# Altium PCB Portablizer_PCB.PcbDoc
Units mm, origin at the board's own origin, x right, y up, seen from the top; angles counter-clockwise.
Board outline 73.91 x 92.08 mm, 2 copper layers (Top Layer, Bottom Layer); 69 components, 53 nets, 338 pads, 22 vias.
Unrouted connection lines stored in the file: 2.
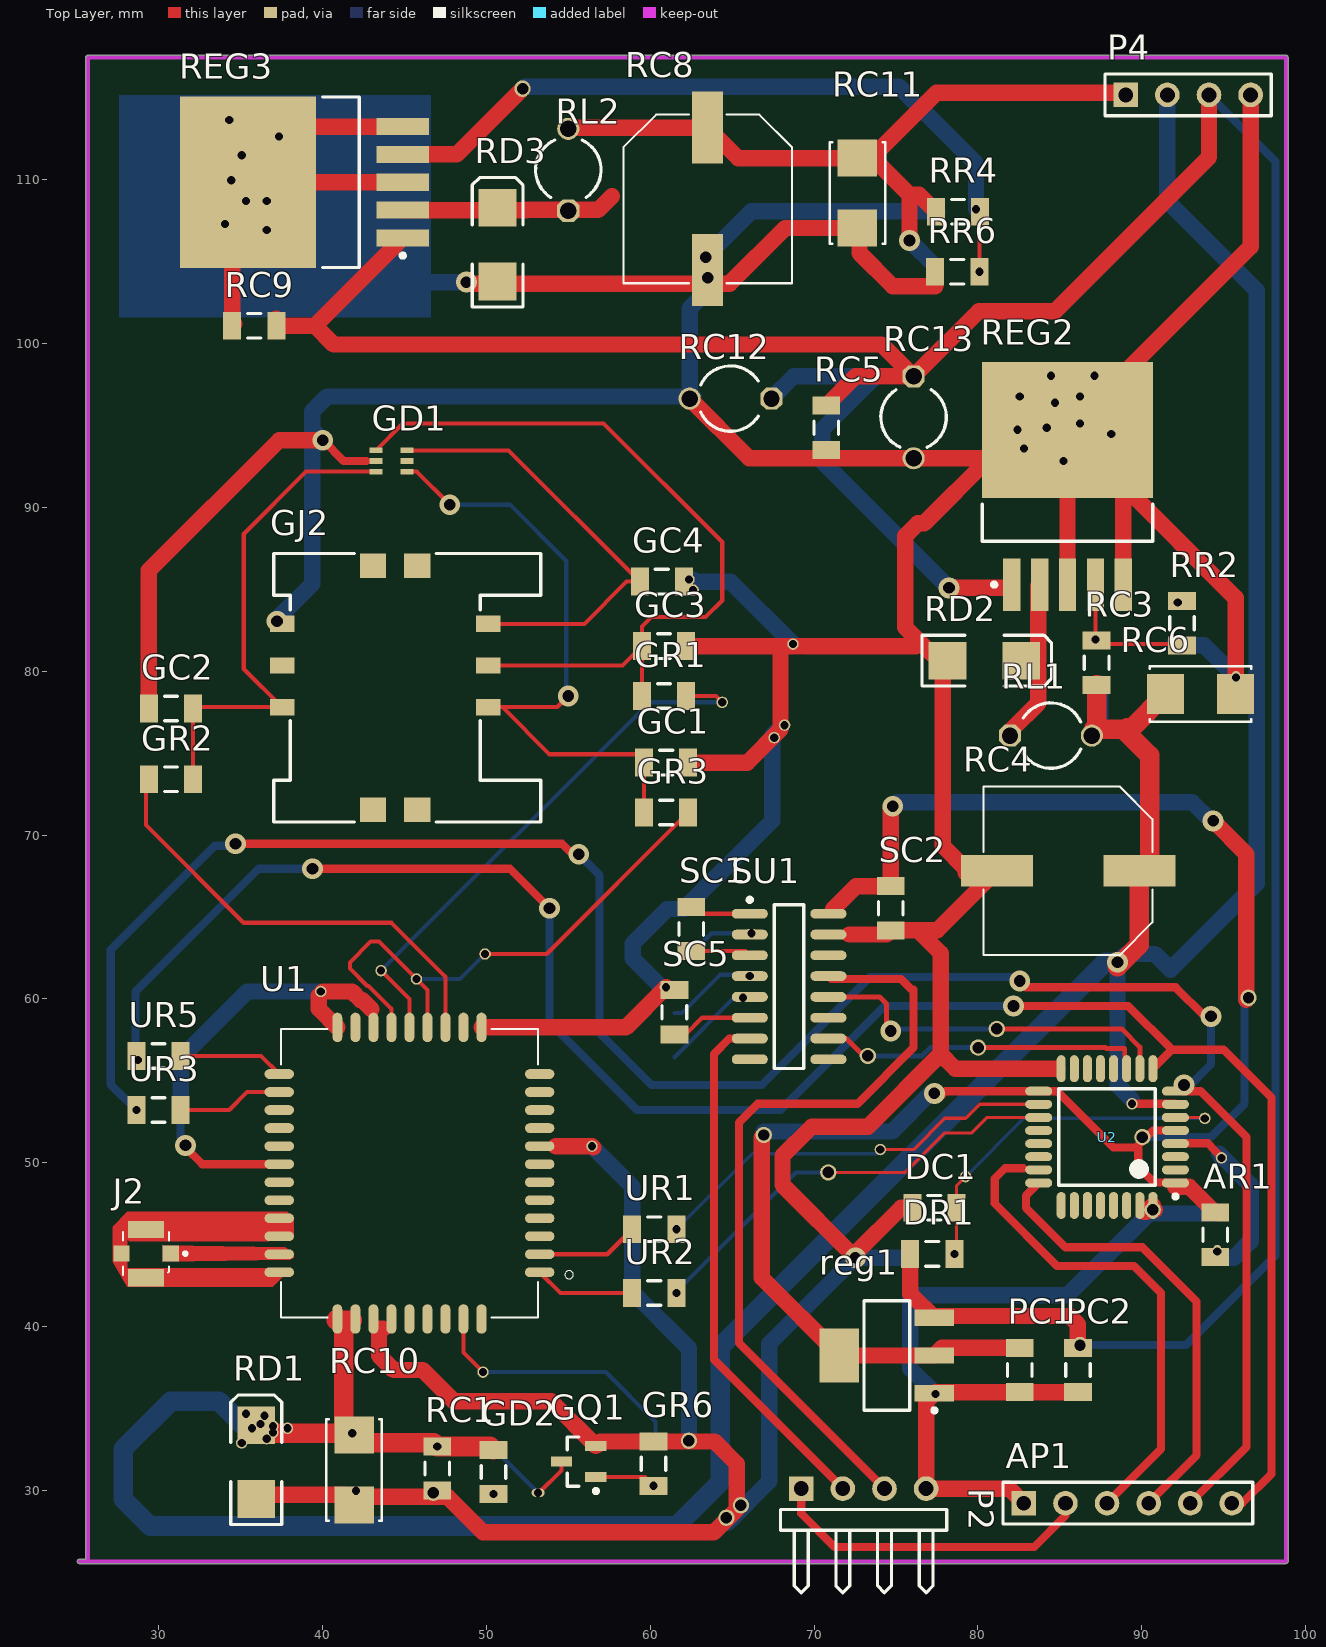
[diagram p0: Top Layer view]
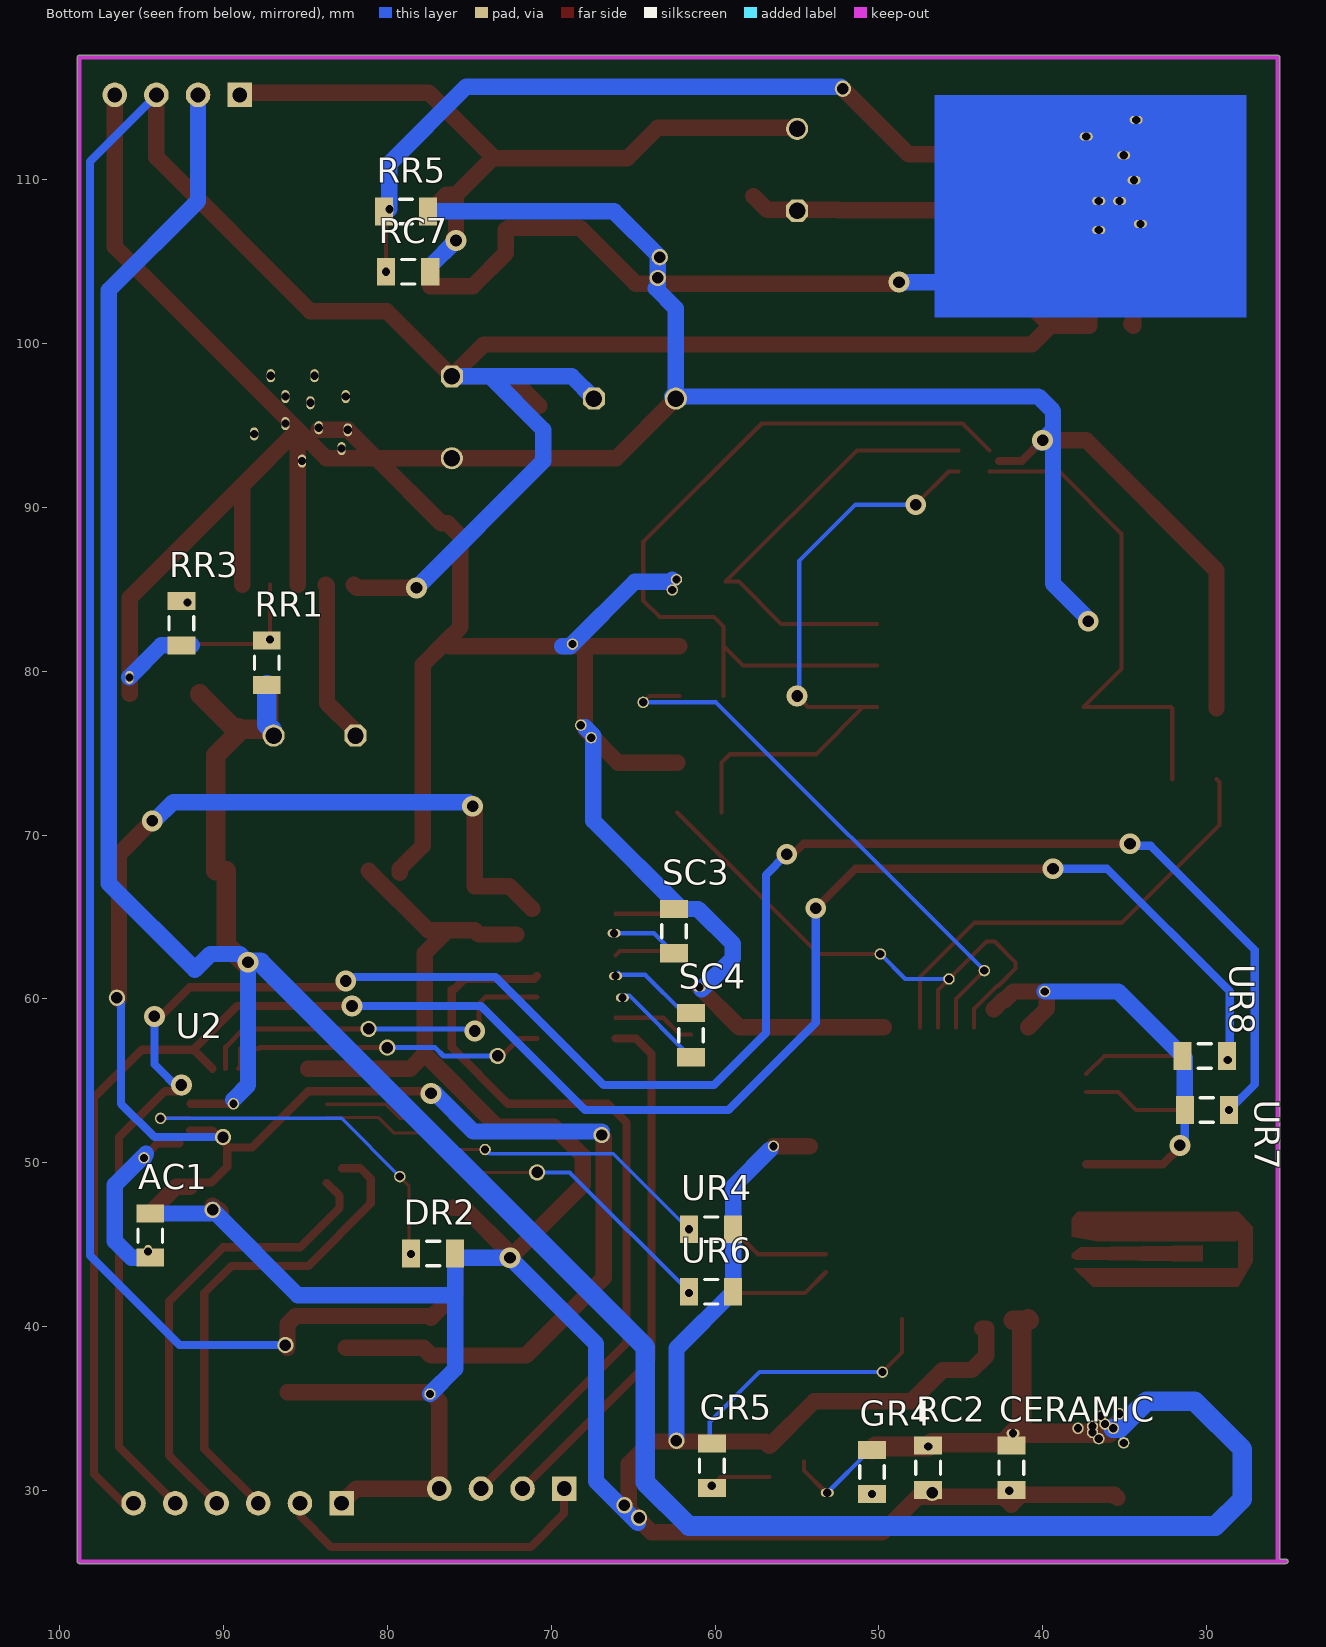
[diagram p1: Bottom Layer view, seen from below]

## Layer stack, top to bottom
Top Solder: solder mask 0.0102, Solder Resist, Dk 3.5
Top Layer: signal copper 0.0356
Dielectric 1: dielectric 0.32, FR-4, Dk 4.8
Bottom Layer: signal copper 0.0356
Bottom Solder: solder mask 0.0102, Solder Resist, Dk 3.5

## Board outline
25.146,25.527 cw(c25.146,25.654) 25.146,25.781 25.527,25.781 25.527,117.475 cw(c25.654,117.475) 25.654,117.602 98.806,117.602 cw(c98.806,117.475) 98.933,117.475 98.933,25.654 cw(c98.806,25.654) 98.806,25.527

## Design rules (kind name [scope] priority, off if disabled: settings)
Clearance [All] p1: gap=0.254 ignorepadtopadclearanceinfootprint=FALSE except(0: Arc-Hole Track-Hole SMDPad-Hole THPad-Hole Via-Hole Fill-Hole Poly-Hole Region-Hole Text-Hole)
PolygonConnect [All] p1: connectstyle=Relief reliefconductorwidth=0.254 reliefentries=4 polygonreliefangle="90 Angle" airgapwidth=0.254
RoutingVias [All] p1: holewidth=0.711 width=1.27 viastyle="Through Hole" minholewidth=0.711 minwidth=1.27 maxholewidth=0.711 maxwidth=1.27
SolderMaskExpansion [All] p1: expansion=0.102
Width Width_1 [(InNet('3.3V') OR InNet('5V_POS') OR InNet('NetRD2_2') OR InNet('9V')OR InNet('NetRD3_2') OR InNet('v12') OR InNet('GND'))] p1: maxlimit=1.2 minlimit=0.5 preferedwidth=1
Width [All] p2: maxlimit=1.5 minlimit=0.256 preferedwidth=0.3 minimp=50.000000 maximp=50.000000 favimp=50.000000
30 further rules are at their usual default settings.

## Components (designator, comment, footprint, x,y, rotation, side; value= is the part's Value field where it differs from the comment)
AC1 "Cap Semi" C1206 94.488,45.546 r90 bottom value=100pF
AP1 "ARM CONNECTOR" HDR1X6 82.804,29.21 r0 top
AR1 "Res3" c1206 94.488,45.593 r270 top value=10K
CERAMIC "1~10uF" C1206 41.91,31.369 r90 bottom
DC1 "33pF" C1206 77.343,47.244 r0 top
DR1 "Res3" c1206 77.216,44.432 r0 top value=3M
DR2 "Res3" c1206 77.216,44.45 r180 bottom value=1M
GC1 "33pF" C1206 60.96,74.422 r180 top
GC2 "22pF" C1206 30.734,77.724 r0 top
GC3 "33pF" C1206 60.833,81.534 r180 top
GC4 "100nF" C1206 60.706,85.471 r0 top
GD1 "SMF05C.TCT" SC70-6 44.196,92.837 r270 top
GD2 "LED2" C1206 50.419,31.115 r270 top
GJ2 "SIM_HOLDER" GCT_SIM2055-6-0-XX-00-X_REVI 43.815,78.994 r270 top
GQ1 "PMBT3904" SOT23_N 55.626,31.75 r180 top
GR1 "51" C1206 60.833,78.486 r0 top
GR2 "51" C1206 30.734,73.406 r180 top
GR3 "51" C1206 60.96,71.374 r0 top
GR4 "4.7k" C1206 50.419,31.115 r270 bottom
GR5 "4.7k" C1206 60.198,31.496 r90 bottom
GR6 "47k" C1206 60.198,31.623 r270 top
J2 "1661" MOLEX_1661 29.21,44.45 r90 top
P2 "Header 4H" HDR1X4H 69.215,30.099 r0 top
P4 "Header 4" HDR1X4 89.027,115.189 r0 top
PC1 "Cap Semi" C1206 82.55,37.338 r270 top value=22uF
PC2 "PC1" C1206 86.106,37.338 r270 top value=10uF
RC1 "33pF" C1206 46.99,31.323 r90 top
RC2 "10pF" C1206 46.99,31.369 r90 bottom
RC3 "15nF" C1206 87.249,80.518 r90 top
RC4 "470 μF; 25 V" "WCAP-PSLC 10x12.4x4.5" 85.503,67.818 r180 top
RC5 "100nF" C1206 70.739,94.869 r270 top
RC6 "10uF; 25V" CAPCP6032X280N 93.599,78.613 r0 top
RC7 "15nF" C1206 78.74,104.394 r0 bottom
RC8 "470 μF; 25 V" "WCAP-PSLC 10x12.4x4.5" 63.5,108.839 r270 top
RC9 "100nF" C1206 35.814,101.092 r180 top
RC10 "10uF; 25V" CAPCP6032X280N 41.91,31.242 r270 top
RC11 "10uF; 25V" CAPCP6032X280N 72.644,109.195 r270 top
RC12 "1000uF 16V" CAPR5-4X5 64.897,96.647 r180 top value=100pF
RC13 "1000uF 16V" CAPR5-4X5 76.073,95.504 r270 top value=100pF
RD1 "CDZ55" SMB 35.941,31.714 r90 top
RD2 "SM5822" SMB 80.391,80.645 r0 top
RD3 "SM5822" SMB 50.673,106.045 r90 top
reg1 "ams1117-3.3" SOT223_N 74.443,38.227 r180 top
REG2 "LM2596S-ADJ" TS5B_N 85.471,91.292 r90 top
REG3 "LM2596S-ADJ" TS5B_N 38.883,109.855 r180 top
RL1 "68uH 3.1A (47 33)" CAPR5-4X5 84.455,76.073 r0 top value=10mH
RL2 "68uH 3.1A (47 33)" CAPR5-4X5 54.991,110.617 r90 top value=10mH
RR1 "4.7k; 1%" C1206 87.376,80.518 r90 bottom
RR2 "1k; 1%" C1206 92.456,82.931 r270 top
RR3 "1k; 1%" C1206 92.583,82.931 r90 bottom
RR4 "10k; 1%" C1206 78.787,108.059 r0 top
RR5 "1.8k; 1%" C1206 78.867,108.077 r0 bottom
RR6 "1.8k; 1%" C1206 78.74,104.394 r0 top
SC1 "100nF" C1206 62.502,64.262 r90 top
SC2 "100nF" C1206 74.676,65.532 r90 top
SC3 "100nF" C1206 62.502,64.135 r90 bottom
SC4 "100nF" C1206 61.468,57.785 r270 bottom
SC5 "100nF" C1206 61.468,59.182 r270 top
SU1 "MAX3232ESE+" SO-16_N 68.471,60.753 r0 top
U1 "SIM800C" LCC110P1570X1760X250-42N 45.292,49.356 r180 top
U2 "STM32F030K6T6" STM-LQFP32_N 87.884,51.562 r180 bottom
UR1 "Res3" c1206 60.245,45.932 r0 top value=1K
UR2 "Res3" c1206 60.245,42.037 r180 top value=1K
UR3 "Res3" c1206 29.972,53.213 r180 top value=1K
UR4 "Res3" c1206 60.245,45.932 r180 bottom value=5.6K
UR5 "Res3" c1206 29.972,56.515 r0 top value=1K
UR6 "Res3" c1206 60.245,42.122 r180 bottom value=5.6K
UR7 "Res3" c1206 29.972,53.213 r0 bottom value=5.6K
UR8 "Res3" c1206 30.099,56.515 r0 bottom value=5.6K

## Footprints (in the part's own frame and the unit in brackets; to place one, negate y for a bottom-side part, rotate by r counter-clockwise, add the part's x,y. Pads: shape width x height; smd on the part's side, far side on the other; paste and mask are expansions set on the pad)
C1206 [mm] "Chip Capacitor, Body 3.2x1.6mm, IPC High Density"
  rect 1.1x1.7 smd: 1(-1.35,0) 2(1.35,0)
  silkscreen extent -0.4,-0.75 0.4,0.75, body extent -1.7,-0.9 1.7,0.9, height 1.3
c1206 [mm]
  rect 1.1x1.7 smd: 1(-1.35,0) 2(1.35,0)
  silkscreen extent -0.4,-0.75 0.4,0.75, body extent -1.7,-0.9 1.7,0.9, height 1.3
CAPCP6032X280N [mil]
  rect 89x95 smd: 1(-84,0) 2(84,0)
  silkscreen extent -122,-67 122,67
CAPR5-4X5 [mm]
  oct 1.35x1.35 hole 1: 1(-2.5,0)
  round 1.35 hole 1: 2(2.5,0)
  silkscreen extent -1.69,-2 1.82,2
GCT_SIM2055-6-0-XX-00-X_REVI [mm]
  rect 1.5x1.6 smd: 8(-7.45,-0.75) 9(7.45,-0.75) 10(7.45,1.95) 11(-7.45,1.95)
  rect 1x1.5 smd: C1(-3.9,6.3) C2(-1.36,6.3) C3(1.18,6.3) C5(-3.9,-6.3) C6(-1.36,-6.3) C7(1.18,-6.3)
  silkscreen extent -8.2,-6.8 8.2,9.5
HDR1X4 [mm] "Connector; Header; 4 Position"
  rect 1.5x1.5 hole 0.9: 1(0,0)
  round 1.5 hole 0.9: 2(2.54,0) 3(5.08,0) 4(7.62,0)
  silkscreen extent -1.27,-1.27 8.89,1.27
HDR1X4H [mm] "Connector; Header; 4 Position; Right Angle"
  rect 1.5x1.5 hole 0.9: 1(0,0)
  round 1.5 hole 0.9: 2(2.54,0) 3(5.08,0) 4(7.62,0)
  silkscreen extent -1.27,-6.35 8.89,-1.27
HDR1X6 [mm] "Connector; Header; 6 Position"
  rect 1.5x1.5 hole 0.9: 1(0,0)
  round 1.5 hole 0.9: 2(2.54,0) 3(5.08,0) 4(7.62,0) 5(10.16,0) 6(12.7,0)
  silkscreen extent -1.27,-1.27 13.97,1.27
LCC110P1570X1760X250-42N [mm]
  oval 1.8x0.6 smd: 1(-7.95,6.05) 2(-7.95,4.95) 3(-7.95,3.85) 4(-7.95,2.75) 5(-7.95,1.65) 6(-7.95,0.55) 7(-7.95,-0.55) 8(-7.95,-1.65) 9(-7.95,-2.75) 10(-7.95,-3.85) 11(-7.95,-4.95) 12(-7.95,-6.05) 22(7.95,-6.05) 23(7.95,-4.95) 24(7.95,-3.85) 25(7.95,-2.75) 26(7.95,-1.65) 27(7.95,-0.55) 28(7.95,0.55) 29(7.95,1.65) 30(7.95,2.75) 31(7.95,3.85) 32(7.95,4.95) 33(7.95,6.05)
  oval 0.6x1.8 smd: 13(-4.4,-8.9) 14(-3.3,-8.9) 15(-2.2,-8.9) 16(-1.1,-8.9) 17(0,-8.9) 18(1.1,-8.9) 19(2.2,-8.9) 20(3.3,-8.9) 21(4.4,-8.9) 34(4.4,8.9) 35(3.3,8.9) 36(2.2,8.9) 37(1.1,8.9) 38(0,8.9) 39(-1.1,8.9) 40(-2.2,8.9) 41(-3.3,8.9) 42(-4.4,8.9)
  silkscreen extent -10,-8.8 7.85,8.8
MOLEX_1661 [mm]
  rect 1x1 smd: 1(0,-1.5) 3(0,1.5)
  rect 1.05x2.2 smd: 2(-1.475,0) 4(1.475,0)
  silkscreen extent -1.3,-2.5 1.3,1.4
SC70-6 [mm]
  rect 0.35x0.8 smd: 1(-0.65,-0.95) 2(0,-0.95) 3(0.65,-0.95) 4(0.65,0.95) 5(0,0.95) 6(-0.65,0.95)
SMB [mm]
  rect 2.3x2.3 smd: 1(-2.25,0) 2(2.25,0)
  silkscreen extent -3.8,-1.55 4.1,1.55
SO-16_N [mm] "SOIC, 16-Leads, Body 9.9x3.9mm, Pitch 1.27mm, IPC Medium Density"
  oval 2.2x0.6 smd: 1(-2.4,4.445) 2(-2.4,3.175) 3(-2.4,1.905) 4(-2.4,0.635) 5(-2.4,-0.635) 6(-2.4,-1.905) 7(-2.4,-3.175) 8(-2.4,-4.445) 9(2.4,-4.445) 10(2.4,-3.175) 11(2.4,-1.905) 12(2.4,-0.635) 13(2.4,0.635) 14(2.4,1.905) 15(2.4,3.175) 16(2.4,4.445)
  silkscreen extent -2.52,-5 0.9,5.42, body extent -2,-5 2,5, height 1.75
SOT23_N [mm]
  rect 1.3x0.6 smd: 1(-1.05,0.95) 2(-1.05,-0.95) 3(1.05,0)
  silkscreen extent -1.18,-1.5 0.7,1.92, body extent -0.7,-1.5 0.7,1.5, height 1.1
SOT223_N [mm] "SOT223, 4-Leads, Body 6.5x3.5mm, Pitch 2.3mm, Lead Span 7mm, IPC Medium Density"
  rect 2.4x1 smd: 1(-2.9,2.3) 2(-2.9,0) 3(-2.9,-2.3)
  rect 2.4x3.3 smd: 4(2.9,0)
  silkscreen extent -3.03,-3.35 1.4,3.47, body extent -1.85,-3.35 1.85,3.35, height 1.7
STM-LQFP32_N [mm] "QFP, 32-Leads, Body 7x7mm, Pitch 0.8mm, IPC Medium Density"
  oval 1.65x0.55 smd far side: 1(-4.175,-2.8) 2(-4.175,-2) 3(-4.175,-1.2) 4(-4.175,-0.4) 5(-4.175,0.4) 6(-4.175,1.2) 7(-4.175,2) 8(-4.175,2.8) 17(4.175,2.8) 18(4.175,2) 19(4.175,1.2) 20(4.175,0.4) 21(4.175,-0.4) 22(4.175,-1.2) 23(4.175,-2) 24(4.175,-2.8)
  oval 0.55x1.65 smd far side: 9(-2.8,4.175) 10(-2,4.175) 11(-1.2,4.175) 12(-0.4,4.175) 13(0.4,4.175) 14(1.2,4.175) 15(2,4.175) 16(2.8,4.175) 25(2.8,-4.175) 26(2,-4.175) 27(1.2,-4.175) 28(0.4,-4.175) 29(-0.4,-4.175) 30(-1.2,-4.175) 31(-2,-4.175) 32(-2.8,-4.175)
  body extent -3.5,-3.5 3.5,3.5, height 1.6
TS5B_N [mm]
  rect 3.2x1.05 smd: 1(-6,3.4) 2(-6,1.7) 3(-6,0) 4(-6,-1.7) 5(-6,-3.4)
  rect 8.3x10.45 smd: 6(3.45,0)
  silkscreen extent -6.12,-5.2 -1.1,5.2, body extent -3.35,-5.2 6.05,5.2, height 4.65
"WCAP-PSLC 10x12.4x4.5" [mm]
  rect 4.4x1.9 smd: 1(-4.35,0) 2(4.35,0)
  silkscreen extent -5.15,-5.15 5.15,5.15, body extent -5.5,-5.15 5.5,5.15, height 12.45

## Part data
AC1 PC1: "Capacitor (Semiconductor SIM Model)", LatestRevisionDate=29-May-2009, LatestRevisionNote="IPC-7351 Footprint Added.", PackageDescription="Chip Capacitor", PackageReference=C1206, Published=8-Jun-2000, Publisher="Altium Limited"
AP1: library part "Header 6", "Header, 6-Pin", LatestRevisionDate=17-Jul-2002, LatestRevisionNote="Re-released for DXP Platform.", Publisher="Altium Limited"
AR1 DR1 DR2 UR1 UR2 UR3 UR4 UR5 UR6 UR7 UR8: "Resistor", LatestRevisionDate=29-May-2009, LatestRevisionNote="IPC-7351 Footprint Added.", PackageDescription="Chip Resistor", PackageReference=J1-0603, Published=8-Jun-2000, Publisher="Altium Limited"
CERAMIC DC1 RC1 RC2 RC3 RC6 RC7 RC10 RC11: library part Cap, "Capacitor", LatestRevisionDate=17-Jul-2002, LatestRevisionNote="Re-released for DXP Platform.", PackageDescription="Radial Cap, Thru-Hole; 2 Leads; 0.3 in Pin Spacing", PackageReference=RAD-0.3, Published=8-Jun-2000, Publisher="Altium Limited", STATE=NOT-AVAILABLE, TYPE=tantalum
GC1 GC2 GC3 GC4 RC5 RC9: library part Cap-Bipolar, "Bipolar Capacitor", Voltage=100V, Adding Date=1387/12/20, Designer="Saeid Jorablo", Organazation=ControTec
GD1: Package="SOT-363 Diodes Inc.", Availability=Unavailable, MF=Semtech, MP=SMF05C.TCT, Price=None
GD2: "Typical RED, GREEN, YELLOW, AMBER GaAs LED", LatestRevisionDate=17-Jul-2002, LatestRevisionNote="Re-released for DXP Platform.", PackageDescription="SM LED; 2 Flat Leads", PackageReference=3.2X1.6X1.1, PackageVersion=Feb-2002, Published=8-Jun-2000, Publisher="Altium Limited"
GJ2: library part SIM5051-6-0-18-00-X_REVF, "Memory Socket, Sim Card, 6pos", Package=None, Availability=Unavailable, MF="Global Connector Technology", MP="SIM5051-6-0-18-00-A REV C", Price=None
GQ1: "NPN Switching Transistor", ComponentLink1Description="Manufacturer Link", ComponentLink1URL=http://www.semiconductors.philips.com/, ComponentLink2Description=Datasheet, ComponentLink2URL=http://www.semiconductors.philips.com/acrobat/datasheets/PMBT3904_4.pdf, DatasheetVersion=27-Apr-1999, LatestRevisionDate=12-Dec-2006, LatestRevisionNote="IPC-7351 Footprint Added.", PackageDescription="3-Pin SOT-23 Package 0.95 mm Pitch, 2.3 mm Lead Span", PackageReference=SOT23, PackageVersion=May-1999, Published=17-Sep-2003, Publisher="Altium Limited"
GR1 GR2 GR3 GR4 GR5 GR6: library part Resistor, "Resistor"
J2: "uFL SMT Antenna Connector", Package=None, Availability=Unavailable, MF="Keystone Electronics", MP=1661, Price=None, SnapEDA_Link=https://www.snapeda.com/parts/1661/Keystone%20Electronics/view-part/?ref=snap
P2: "Header, 4-Pin, Right Angle", LatestRevisionDate=17-Jul-2002, LatestRevisionNote="Re-released for DXP Platform.", Publisher="Altium Limited"
P4: "Header, 4-Pin", LatestRevisionDate=17-Jul-2002, LatestRevisionNote="Re-released for DXP Platform.", Publisher="Altium Limited"
PC2: library part "Cap Semi", "Capacitor (Semiconductor SIM Model)", LatestRevisionDate=29-May-2009, LatestRevisionNote="IPC-7351 Footprint Added.", PackageDescription="Chip Capacitor", PackageReference=C1206, Published=8-Jun-2000, Publisher="Altium Limited"
RC4 RC8: library part "WCAP-PSLC 10x12.4x4.5 875075361006", "WCAP-PSLC Aluminum Polymer Capacitors , 680 µF; + / - 20%; 16 V , 10 x 12,4", Capacitance="680 µF", Manufacturer="Wurth Elektronik", partNo=875075361006, Application="Low voltage port filtering, appplid to high-end switching power supply, PC(desktop,laptop ),industrial computer, VGA card, server power, charger, TV, digital set-top box,DC-DC power module, game machine etc which consume large current with high speed circuit.", Characteristics="Aluminum Polymer Capacitors; Recommended soldering: Reflow; Operating temperature: –55 °C to +105 °C; Large capacitance SMD product series; Very low ESR at high frequency range; High permissible ripple current; Long life and high reliability; Load life: 2000 h @ +105 °C", ComponentLink1Description=Manufacturer, ComponentLink1URL=http://www.we-online.com, ComponentLink2Description=Datasheet, ComponentLink2URL=http://katalog.we-online.de/pbs/datasheet/875075361006.pdf, Created by="Karrer Zheng", Created Date=6/8/2015, E-mail=libraries@we-online.com
RC12 RC13: library part "Cap Pol1", "Polarized Capacitor (Radial)", LatestRevisionDate=17-Jul-2002, LatestRevisionNote="Re-released for DXP Platform.", PackageDescription="Polarized Capacitor (Radial); 2 Leads", PackageReference=RB7.6-15, Published=8-Jun-2000, Publisher="Altium Limited"
RD1 RD2 RD3: library part "D Schottky", "Schottky Diode", Code_JEDEC=DO-214-AA, LatestRevisionDate=17-Jul-2002, LatestRevisionNote="Re-released for DXP Platform.", PackageDescription="DO-214-AA/SMB; 2 C-Bend Leads; Body 5.3 x 3.6 mm, inc. leads (LxW)", PackageReference=SMB, Published=8-Jun-2000, Publisher="Altium Limited"
REG2 REG3: "SIMPLE SWITCHER® Power Converter 150 KHz 3A Step-Down Voltage Regulator, 5-pin TO-263", Manufacturer="National Semiconductor", PackageTopMarking="NSUZXYTTE#*LM2596S*-ADJ P+", PowerWise=N, Supplier Part Number 1=1523864, Code_JEDEC=MO-169-AB, ComponentLink1Description="LM2596 Datasheet", ComponentLink1URL=http://www.national.com/ds/LM/LM2596.pdf, ComponentLink2Description="LM2596 Web Page", ComponentLink2URL=http://www.national.com/pf/LM/LM2596.html, ComponentLink3Description="TS5B Package Page", ComponentLink3URL=http://www.national.com/packaging/folders/ts5b.html, CompType=Switcher, DatasheetVersion=May-2002, PackageDescription="TO-263, Molded, .400 x .390 x .180in, 5 Lead, .067in Pitch, Surface Mount", PackageReference=TS5B, PackageVersion="revD, Apr-2005", PartNumber=LM2596S-ADJ, PinCount=5, Published=4-Dec-2008, Publisher="Altium Limited", RoHS=N, Supplier 1=Farnell, Supplier 2=Farnell, Supplier Part Number 2=9494367
RL1 RL2: library part Inductor, "Inductor", Code_IEC=1005, Code_JEITA=0402, LatestRevisionDate=29-May-2009, LatestRevisionNote="IPC-7351 Footprint Added.", PackageDescription="Chip Inductor", PackageReference=0402-A, Published=8-Jun-2000, Publisher="Altium Limited"
RR1 RR2 RR3 RR4 RR5 RR6: library part Res1, "Resistor", LatestRevisionDate=17-Jul-2002, LatestRevisionNote="Re-released for DXP Platform.", PackageDescription="Axial Device, Thru-Hole; 2 Leads; 0.3 in Pin Spacing", PackageReference=AXIAL-0.3, Published=8-Jun-2000, Publisher="Altium Limited"
SC1 SC2 SC3 SC4 SC5: library part "Cap Semi", "Capacitor", Dielectric=X7R, Package=0603, Tolerance=10%, Category=Capacitor, Company=AVX, Foreign Supplyer=False, Subcategory=Ceramic
SU1: library part MAX3232CSE, "3.0V TO 5.5V, Low-Power, up to 1Mbps, True RS-232 Transceiver Using Four 0.1µF External Capacitor", Package=SO16, Category=IC, Company=MAXIM, Foreign Supplyer=False, Part Number=MAX3232ESE+, Subcategory=MAX
U1: "Module: GSM/Bluetooth; GPRS; 2G; 1800MHz, 900MHz; 85.6kbps; SMD", Package=None, Availability=Unavailable, MF=Simcom, MP=SIM800C, Price=None, SnapEDA_Link=https://www.snapeda.com/parts/SIM800C/Simcom/view-part/?ref=snap
U2: "ARM Cortex-M0 32-bit MCU, 32 KB Flash, 4 KB Internal RAM, 26 I/Os, 32-pin LQFP, -40 to 85 degC, Tray", I/Os (High Current)=26, Operating Frequency(F) (Processor speed) (MHz)=48, Supplier Part Number 1=497-14046-ND, Supply Voltage(Vcc) min (V)=2.4, ComponentLink1Description="Manufacturer URL", ComponentLink1URL=http://www.st.com/web/en/home.html, ComponentLink2Description=Datasheet, ComponentLink2URL=http://www.st.com/st-web-ui/static/active/en/resource/technical/document/datasheet/DM00088500.pdf, ComponentLink3Description="Package Specification", ComponentLink3URL=http://www.st.com/st-web-ui/static/active/en/resource/technical/document/datasheet/DM00088500.pdf, Core="ARM Cortex-M0", DatasheetVersion="Rev. 1", FLASH Size (Prog) (kB)=32, Internal RAM Size (kB)=4, Mounting Technology="Surface Mount", PackageDescription="32-Pin Low Profile Quad Flat Package, 7 x 7 mm Body, 0.8 mm Pitch", PackageReference=LQFP32, PackageVersion="Rev. 1, 07/2013", Packing=Tray, PartNumber=STM32F030K6T6, Supplier 1=Digi-Key, Supplier 2=Newark, Supplier 3=Mouser, Supplier Part Number 2=19X6194, Supplier Part Number 3=511-STM32F030K6T6

## Free pads (board coordinates)
  oval 0.5x0.8 hole 0.5: 8(28.622,53.213) 9(28.702,56.261) 10(61.595,42.037) 11(61.595,45.932) 18(87.171,81.946) 20(95.758,79.629) 21(79.883,108.204) 31(86.233,95.123) 32(87.122,98.044) 33(84.455,98.044) 34(84.201,94.869) 35(85.217,92.837) 36(88.138,94.488) 37(82.804,93.599) 38(82.423,94.742) 39(82.55,96.774) 40(86.233,96.774) 41(84.709,96.393) 48(94.615,44.577)
  oval 0.8x0.5 hole 0.5: 12(78.566,44.432) 13(66.071,61.388) 14(65.659,60.071) 15(66.167,64.008) 16(60.96,60.706) 19(92.202,84.201) 22(80.09,104.394) 23(36.576,108.712) 24(35.306,108.712) 25(34.417,109.982) 26(35.052,111.506) 27(37.338,112.649) 28(34.29,113.665) 29(34.036,107.315) 30(36.576,106.934) 42(42.037,29.972) 43(41.805,33.481) 44(46.99,32.674) 45(50.419,29.765) 46(60.198,30.273) 47(53.149,29.845)
  round 0.7 hole 0.5: 49(49.911,62.738) 50(45.72,61.214) 51(43.561,61.722) 52(64.389,78.105) 54(49.784,37.211) 55(94.869,50.292) 59(77.404,35.875) 60(79.248,49.149) 61(93.853,52.705) 62(35.306,34.671) 63(36.957,33.528) 64(36.957,33.909) 65(35.687,33.782) 66(36.449,34.544) 67(37.846,33.782) 68(36.195,34.036) 69(36.576,33.147) 70(35.052,32.893) 74(89.408,53.594) 75(74.041,50.8) 77(62.357,85.598) 78(62.611,84.963) 79(67.564,75.946) 80(68.199,76.708) 82(68.707,81.661) 83(39.878,60.452) 84(56.436,51.006)
  round 1 hole 0.7: 85(52.197,115.57) 86(63.5,104.013) 87(63.373,105.283) 88(90.678,47.117) 89(86.233,38.862) 90(64.643,28.321) 91(65.532,29.083) 92(46.736,29.845) 93(62.357,33.02) 94(81.153,58.166) 95(73.279,56.515) 96(80.01,57.023) 97(90.043,51.562) 98(96.52,60.071) 99(66.929,51.689) 100(70.866,49.403)

## Via types
v1: diameter 1.27, hole 0.711, Top Layer to Bottom Layer, 22 vias

## Nets (pads, with @x,y where several pads share a name; then routed paths per layer and width w, separated by ;. In a path a pad name is that pad's centre, name@x,y a point inside that pad or via, vN(x,y) a via of type N, cw(c..) or ccw(c..) an arc to the next point about the centre after c; other vN are vias at no path point)
3.3V: AR1.1 pad.97 pad.98 pad.99 PC1.1 reg1.2 reg1.4 SC2.2 SU1.16 U2.1 U2.5 U2.17 | length 116.5
  Top Layer w0.5: v1@77.471,54.166 77.648,53.989 78.02,54.362 U2.17 84.83,54.362 88.265,50.927 89.662,50.927 ; U2.1 92.038,48.783 90.746,48.783 89.789,49.74 89.789,50.8 89.662,50.927 ; U2.5 90.697,51.962 89.662,50.927
  Top Layer w1: pad.99@66.802,51.562 66.802,42.968 reg1.4 reg1.2 77.804,38.688 PC1.1 ; SU1.16@71.163,65.49 72.555,66.882 SC2.2 74.676,71.628 v1(74.803,71.755) ; v1(77.343,54.229) 77.409,54.229 v1@77.471,54.167 ; U2.1@92.059,48.533 92.898,48.533 AR1.1 ; v1(94.361,70.866) 96.393,68.834 pad.98@96.393,59.944
  Bottom Layer w0.5: pad.97 94.234,51.562 96.266,53.594 96.266,59.817 pad.98
  Bottom Layer w1: pad.99 66.929,51.904 74.764,51.904 77.089,54.229 v1(77.343,54.229) ; v1(74.803,71.755) 75.057,72.009 93.091,72.009 94.234,70.866 v1(94.361,70.866)
5V_POS: AP1.2 P2.1 | length 20
  Top Layer w0.5: P2.1 69.215,28.575 71.247,26.543 83.439,26.543 85.344,28.448 AP1.2
9V: P4.1 RC7.1 RC8.1 RC11.1 RL2.2 RR4.1 | length 47.3
  Top Layer w1: RL2.2 55.063,113.189 RC8.1 65.361,111.328 RC11.1 73.482,111.328 RC11.1@73.533,111.379 ; v1(75.819,106.299) 75.946,106.426 75.819,106.553 75.819,109.093 ; RR4.1 76.403,109.093 75.819,109.093 ; P4.1 88.9,115.316 77.47,115.316 RC11.1@73.533,111.379 ; RC11.1@73.533,111.379 75.819,109.093
  Bottom Layer w1: v1(75.819,106.299) 77.39,104.728 RC7.1
GND: AC1.2 AP1.1 CERAMIC.1 DC1.1 DR2.2 GC1.1 GC2.1 GC3.1 GC4.2 GD1.2 GJ2.C5 GQ1.2 GR6.1 J2.2 J2.3 J2.4 P2.4 P4.4 pad.16 pad.20 pad.23 pad.24 pad.25 pad.26 pad.27 pad.28 pad.29 pad.30 pad.31 pad.32 pad.33 pad.34 pad.35 pad.36 pad.37 pad.38 pad.39 pad.40 pad.41 pad.42 pad.59 pad.77 pad.78 pad.79 pad.80 pad.82 pad.83 pad.84 pad.86 pad.87 pad.88 pad.90 pad.91 pad.92 pad.93 PC1.2 PC2.2 RC1.1 RC2.1 RC4.2 RC5.2 RC6.2 RC8.2 RC9.2 RC10.2 RC11.2 RC12.2 RC13.2 RD1.1 RD2.1 RD3.1 reg1.1 REG2.3 REG2.5 REG2.6 REG3.3 REG3.5 REG3.6 RR3.1 RR5.1 RR6.1 SC2.1 SC3.2 SC5.1 SU1.15 U1.8 U1.13 U1.19 U1.21 U1.27 U1.30 U1.31 U1.33 U1.36 U1.37 U2.16 U2.31 U2.32 UR4.2 UR6.2 UR7.2 UR8.2 | length 591
  Top Layer w0.5: v1(31.623,51.054) 31.623,50.927 32.644,49.906 U1.27 ; v1(40.005,94.107) 41.275,92.837 42.672,92.837
  Top Layer w1: GC2.1 29.384,86.153 37.338,94.107 v1(40.005,94.107) ; RD1.1@35.433,29.527 35.624,29.718 41.3,29.718 RC10.2 42.393,29.591 47.625,29.591 49.784,27.432 63.881,27.432 65.278,28.829 65.278,31.623 63.928,32.973 GR6.1 56.949,32.973 GQ1.2 53.943,35.433 48.006,35.433 46.101,37.338 44.323,37.338 43.434,38.227 43.434,39.878 43.688,39.878 ; REG3.6@38.833,113.255 REG3.5 ; U1.21 39.751,59.397 39.751,60.198 40.005,60.452 41.783,60.452 42.325,59.91 42.429,59.91 42.978,59.361 ; REG3.3 REG3.6 34.464,108.886 RC9.2@34.464,101.219 ; v1(48.768,103.759) 48.859,103.668 64.838,103.668 68.231,107.061 RC11.2 ; U1.13 58.51,58.256 pad.16 ; 54.229,51.006 pad.84 pad.84@56.515,50.927 ; GC3.1 68.199,81.534 ; GC1.1 65.913,74.422 67.945,76.454 67.945,81.28 68.199,81.534 ; RC12.2 66.04,93.004 RC13.2 REG2.6@80.685,93.004 ; 72.136,63.928 74.422,63.928 SC2.1 76.327,64.182 ; RC11.2@72.771,106.959 72.771,105.537 74.803,103.505 77.39,103.505 ; DC1.1 75.311,47.244 72.517,44.45 v1(72.517,44.196) 68.072,48.641 68.072,50.419 69.85,52.197 73.291,52.197 77.722,56.628 ; reg1.1 76.835,35.419 P2.4 81.915,30.099 AP1.1 ; pad.59 77.404,35.988 PC1.2 PC2.2 ; RC4.2@79.248,67.691 79.248,67.945 77.851,69.342 77.851,80.391 76.454,81.788 ; RC4.2 77.517,64.182 76.327,64.182 ; REG2.6@84.201,94.742 pad.38 REG2.6@80.685,93.004 ; U2.16@84.855,55.737 78.613,55.737 77.722,56.628 ; REG2.3 REG2.6 ; REG2.5 REG2.6@88.871,91.342 ; U2.32 U2.32@90.414,47.117 ; U2.32@90.805,47.117 pad.88 U2.32@90.414,47.117 ; RC6.2 95.733,84.48 REG2.6@88.871,91.342 ; P4.4 96.647,105.918 REG2.6 ; RC9.2@34.464,101.219 34.591,101.219 RC9.2 RC9.2@34.464,101.219 ; 68.199,81.534 76.2,81.534 76.454,81.788 ; 76.327,64.182 77.724,62.785 77.724,58.674 77.722,58.672 77.722,56.628 ; 76.454,81.788 75.565,82.677 75.565,88.265 76.327,89.027 76.708,89.027 REG2.6@80.685,93.004 ; REG2.6@80.685,93.004 83.733,93.004 REG2.6 ; REG2.6 REG2.6@88.871,91.342 ; U2.32@90.414,47.117 90.297,47.117 90.17,46.99 90.287,46.99 U2.32@90.414,47.117
  Bottom Layer w0.5: UR7.2 31.322,51.355 v1(31.623,51.054)
  Bottom Layer w1: UR7.2 31.322,56.388 UR8.2 35.386,60.452 pad.83 ; 36.703,108.331 36.703,108.204 41.148,103.759 v1(48.768,103.759) ; v1(37.211,83.058) 37.211,83.185 39.37,85.344 39.37,94.742 ; pad.84@56.642,50.8 58.895,48.547 UR4.2 UR6.2 62.357,38.66 pad.93@62.357,33.274 ; pad.16@60.827,60.573 58.928,62.471 58.928,63.373 61.04,65.485 62.056,65.485 67.437,70.866 67.437,76.073 pad.80@67.945,76.581 ; RC12.2 RC12.2@62.397,96.774 ; pad.77@62.611,85.598 62.738,85.471 64.897,85.471 pad.82 68.834,81.534 69.342,81.534 ; RC12.2@62.611,96.774 RC12.2@62.397,96.774 ; pad.87 pad.87@63.5,105.41 ; pad.90@64.711,27.999 67.267,30.554 67.267,38.946 v1(72.517,44.196) 75.612,44.196 DR2.2 75.866,41.91 ; pad.59 75.866,37.413 75.866,41.91 ; RR5.1 66.167,108.077 pad.87@63.5,105.41 ; pad.88 pad.88@90.551,46.99 ; RR3.1@91.948,81.581 RR3.1 93.806,81.581 pad.20 ; AC1.2 90.645,46.896 pad.88@90.551,46.99 ; 39.37,94.742 39.37,95.885 40.259,96.774 RC12.2@62.397,96.774 ; 39.37,94.742 v1(40.005,94.107) ; v1(40.005,94.107) 40.005,93.98 40.132,93.98 v1(40.005,94.107) ; RC12.2@62.397,96.774 62.397,102.148 63.627,103.378 63.5,103.505 pad.86 pad.87@63.5,105.41 ; 75.866,41.91 85.471,41.91 pad.88@90.551,46.99
GSM_ANT: J2.1 U1.32
NetAC1_1: AC1.1 AR1.2 pad.48 pad.55 U2.4 | length 11.5
  Top Layer w0.5: U2.4@92.71,51.181 94.043,51.181 pad.55
  Bottom Layer w1: AC1.1 95.631,44.196 96.647,45.212 96.647,48.641 94.742,50.546 pad.55
NetGC1_2: GC1.2 GD1.4 GJ2.C3 GR3.1 | length 38.5
  Top Layer w0.254: GD1.4 45.735,92.187 v1(47.752,90.17) ; GJ2.C3 50.964,77.814 ; v1(54.991,78.486) 54.319,77.814 50.964,77.814 ; GR3.1 GC1.2 59.102,74.93 53.848,74.93 50.964,77.814
  Bottom Layer w0.254: v1(47.752,90.17) 51.435,90.17 54.864,86.741 54.864,78.613 v1(54.991,78.486)
NetGC2_2: GC2.2 GD1.3 GJ2.C7 GR2.1 | length 31
  Top Layer w0.254: GR2.1 GC2.2 32.174,77.814 GJ2.C7 35.179,80.15 35.179,88.392 38.974,92.187 GD1.3
NetGC3_2: GC3.2 GD1.1 GJ2.C2 GR1.1 | length 48
  Top Layer w0.254: GD1.1 44.882,95.123 57.15,95.123 64.389,87.884 64.389,84.328 63.373,83.312 60.071,83.312 59.483,82.724 GC3.2 ; GJ2.C2 58.303,80.354 GC3.2 ; GR1.1 GC3.2
NetGC4_1: GC4.1 GD1.6 GJ2.C1 | length 27.8
  Top Layer w0.254: GD1.6 51.34,93.487 GC4.1 58.547,85.471 55.97,82.894 GJ2.C1
NetGD2_2: GD2.2 GR4.2 pad.45
NetGQ1_1: GQ1.1 GR5.1 GR6.2 pad.46 | length 3.7
  Top Layer w0.254: GQ1.1 59.671,30.8 GR6.2
NetGQ1_3: GQ1.3 GR4.1 pad.47 | length 6.4
  Top Layer w0.254: pad.47@53.086,29.845 pad.47 53.213,29.845 54.576,31.208 GQ1.3
  Bottom Layer w0.254: GR4.1 50.529,32.465 pad.47
NetGR1_2: GR1.2 pad.51 pad.52 U1.17 | length 34.2
  Top Layer w0.254: pad.51 45.292,59.991 U1.17 ; GR1.2 64.008,78.486 pad.52
  Bottom Layer w0.254: pad.51 59.944,78.105 pad.52
NetGR2_2: GR2.2 U1.15 | length 28.1
  Top Layer w0.254: GR2.2 29.21,73.232 29.21,70.612 35.179,64.643 44.196,64.643 47.492,61.347 U1.15
NetGR3_2: GR3.2 pad.49 pad.50 U1.16 U1.18 | length 34.9
  Top Layer w0.254: U1.18 44.192,59.392 42.793,60.791 42.714,60.791 41.656,61.849 41.656,62.23 42.926,63.5 43.434,63.5 pad.50 46.392,60.542 U1.16 ; pad.49@49.657,62.738 pad.49 53.674,62.738 GR3.2
  Bottom Layer w0.254: pad.50 48.387,61.214 pad.49
NetGR5_2: GR5.2 pad.54 U1.41 | length 16.9
  Top Layer w0.254: U1.41 48.592,38.403 pad.54
  Bottom Layer w0.254: pad.54 57.277,37.211 60.325,34.163 60.325,32.973 GR5.2
NetRC3_2: pad.18 RC3.2 REG2.4 RR1.2 RR2.2 | length 8.4
  Top Layer w0.254: REG2.4 pad.18 RC3.2 87.456,81.661 RR2.2@91.93,81.661
  Bottom Layer w0.254: pad.18 RR1.2
NetRC7_2: pad.21 pad.22 pad.85 RC7.2 REG3.4 RR4.2 RR5.2 RR6.2 | length 45
  Top Layer w0.254: RR6.2@80.09,104.267 RR6.2 80.09,108.012 RR4.2
  Top Layer w1: REG3.4 48.182,111.555 pad.85@52.07,115.443
  Bottom Layer w1: pad.85@52.261,115.633 52.324,115.697 75.184,115.697 79.883,110.998 pad.21
NetRD2_2: RD2.2 REG2.2 RL1.1 | length 9.5
  Top Layer w1: RL1.1@82.082,76.454 83.693,78.065 83.693,85.214 REG2.2
NetRD3_2: RD3.2 REG3.2 RL2.1 | length 13.1
  Top Layer w1: REG3.2 52.438,108.155 52.451,108.168 56.82,108.168 57.658,109.006
NetRR2_1: pad.19 RR2.1 RR3.2
NetSC1_1: SC1.1 SU1.3 | length 3.7
  Top Layer w0.254: SC1.1 65.817,62.912 SU1.3
NetSC1_2: SC1.2 SU1.1 | length 3.7
  Top Layer w0.254: SC1.2 62.916,65.198 SU1.1
NetSC3_1: pad.15 SC3.1 SU1.2 | length 4.3
  Bottom Layer w0.254: SC3.1 63.725,64.008 pad.15 pad.15@66.294,64.008
NetSC4_1: pad.13 SC4.1 SU1.4 | length 5.5
  Bottom Layer w0.254: SC4.1 61.929,59.135 64.262,61.468 65.913,61.468 pad.13@65.913,61.595
NetSC4_2: pad.14 SC4.2 SU1.5 | length 5.7
  Bottom Layer w0.254: SC4.2 65.231,60.198 pad.14@65.659,60.198
NetSC5_2: SC5.2 SU1.6 | length 5
  Top Layer w0.254: SC5.2 62.15,57.832 63.166,58.848 SU1.6
NetU1_1: U1.1 UR2.2 | length 6.2
  Top Layer w0.254: U1.1 54.511,42.037 UR2.2
NetU1_2: U1.2 UR1.1 | length 6.3
  Top Layer w0.254: U1.2 57.369,44.406 UR1.1
NetU1_22: U1.22 UR5.2 | length 6.5
  Top Layer w0.254: UR5.2 36.233,56.515 U1.22
NetU1_23: U1.23 UR3.1 | length 6.5
  Top Layer w0.254: UR3.1 34.29,53.213 35.383,54.306 U1.23
PA0: DC1.2 DR1.2 DR2.1 pad.12 pad.60 pad.61 U2.6 | length 22.9
  Top Layer w0.2: DR1.2 78.693,44.559 DC1.2 78.693,48.594 pad.60 ; U2.6 93.796,52.762 pad.61
  Bottom Layer w0.2: pad.60 82.804,52.705 pad.61
PA1: CERAMIC.2 GD2.1 P4.2 pad.43 pad.44 pad.62 pad.63 pad.64 pad.65 pad.66 pad.67 pad.68 pad.69 pad.70 pad.74 RC1.2 RC2.2 RC3.1 RC4.1 RC6.1 RC10.1 RD1.2 RL1.2 RR1.1 U1.34 U1.35 U2.7 | length 216.7
  Top Layer w0.5: pad.74 U2.7@92.027,53.594
  Top Layer w1.2: RD1.2@35.433,34.026 35.682,33.777 35.978,33.481 36.957,33.481 pad.43 ; U1.34 40.822,40.386 U1.35@41.783,40.386 ; 41.275,40.073 41.275,34.011 pad.43 ; GD2.1 50.211,32.674 RC1.2 46.771,32.893 42.393,32.893 RC10.1 pad.43 ; RC3.1 87.249,76.621 87.082,76.454 88.9,76.454 ; v1(88.519,62.23) 88.519,61.976 89.853,63.31 RC4.1 ; RC4.1@90.488,67.818 90.488,74.866 88.9,76.454 ; RC6.1 89.393,76.541 89.114,76.541 89.027,76.454 88.9,76.454
  Bottom Layer w1: pad.74@89.408,53.848 88.519,54.737 v1(88.519,62.23) 89.027,62.738 90.805,62.738 91.757,61.785 97.012,67.04 97.012,103.267 91.567,108.712 P4.2
  Bottom Layer w1.2: pad.65 35.306,33.782 33.655,35.433 30.734,35.433 27.813,32.512 27.813,29.464 29.464,27.813 61.595,27.813 64.262,30.48 64.262,38.735 87.757,62.23 v1(88.519,62.23) ; RL1.2@87.082,76.454 87.376,76.748 RR1.1
PA2_ARMTX: AP1.5 pad.8 U2.8 UR3.2 UR7.1 | length 130.2
  Top Layer w0.5: v1(34.671,69.469) 54.61,69.469 55.245,68.834 v1(55.626,68.834) ; v1(82.55,61.087) 82.931,60.706 92.075,60.706 93.853,58.928 v1(94.234,58.928) ; U2.8@92.583,54.362 93.593,54.362 96.393,51.562 96.393,32.639 AP1.5
  Bottom Layer w0.5: pad.8 27.051,54.784 27.051,62.992 33.401,69.342 34.544,69.342 v1(34.671,69.469) ; v1(55.626,68.834) 56.896,67.564 56.896,57.912 60.071,54.737 66.802,54.737 73.406,61.341 82.169,61.341 82.423,61.087 v1(82.55,61.087) ; v1(92.583,54.737) 92.583,54.356 94.234,56.007 v1(94.234,58.928)
PA3_ARMRX: AP1.6 pad.9 U2.9 UR5.1 UR8.1 | length 119.6
  Top Layer w0.5: v1(39.37,67.945) 51.435,67.945 v1(53.848,65.532) ; v1(82.169,59.563) 89.176,59.563 91.843,56.896 ; U2.9 91.843,56.896 ; AP1.6 96.139,29.21 97.917,30.988 97.917,53.975 94.996,56.896 91.843,56.896
  Bottom Layer w0.5: pad.9 28.575,56.388 28.575,60.452 36.068,67.945 v1(39.37,67.945) ; v1(53.848,65.532) 53.848,58.547 59.182,53.213 67.945,53.213 74.295,59.563 v1(82.169,59.563)
PA4: pad.94 SU1.12 U2.10 | length 24
  Top Layer w0.3: SU1.12 73.994,60.118 74.422,59.69 74.422,57.785 v1(74.676,58.039) ; pad.94 88.773,58.166 89.884,57.055 U2.10
  Bottom Layer w0.3: pad.94 75.311,58.166 v1@75.057,57.912 ; v1@75.057,57.912 74.676,58.293 v1(74.676,58.039) 74.676,57.912 v1@75.057,57.912
PA5: pad.95 pad.96 SU1.10 U2.11 | length 19.8
  Top Layer w0.3: SU1.10 71.962,57.578 pad.95@73.025,56.515 ; pad.96 87.798,57.023 87.855,56.966 88.963,56.966 88.963,55.858 U2.11
  Bottom Layer w0.3: pad.95 76.581,56.515 77.089,57.023 pad.96
PA6: U2.12
PA7: U2.13
PA8: pad.11 pad.75 U2.18 UR1.2 UR4.1 | length 25.3
  Top Layer w0.2: pad.75 76.073,50.8 77.978,52.705 79.248,52.705 80.105,53.562 U2.18
  Bottom Layer w0.2: pad.11 66.209,50.546 73.787,50.546 pad.75
PA9: pad.10 pad.100 U2.19 UR2.1 UR6.1 | length 26.5
  Top Layer w0.2: pad.100 75.565,49.403 77.978,51.816 79.629,51.816 80.575,52.762 U2.19
  Bottom Layer w0.256: UR6.1 68.876,49.403 pad.100
PA10: U2.20
PA11: U2.21
PA12: U2.22
PA13: AP1.3 U2.23 | length 30.2
  Top Layer w0.5: 82.783,49.636 82.762,49.657 81.661,49.657 81.026,49.022 81.026,47.498 84.836,43.688 89.535,43.688 91.186,42.037 91.186,32.512 AP1.3
PA14: AP1.4 U2.24 | length 28.2
  Top Layer w0.5: U2.24 82.931,47.984 82.931,47.244 85.344,44.831 90.043,44.831 93.345,41.529 93.345,32.131 AP1.4
PA15: U2.25
PB6: U2.29
PB7: U2.30
POS_RX: P2.2 SU1.7 | length 32.4
  Top Layer w0.5: SU1.7 64.817,57.578 63.881,56.642 63.881,37.973 P2.2
POS_TX: P2.3 SU1.13 | length 47.7
  Top Layer w0.5: SU1.13 71.045,61.214 75.311,61.214 75.946,60.579 76.073,60.579 76.073,57.023 72.644,53.594 66.548,53.594 65.405,52.451 65.405,38.989 P2.3
V12: DR1.1 P4.3 pad.89 PC2.1 RC5.1 RC9.1 RC12.1 RC13.1 reg1.3 REG2.1 REG3.1 | length 214
  Top Layer w1: RC9.1@37.164,101.52 RC9.1 39.52,101.092 ; REG3.1 39.52,101.092 ; RC5.1 72.524,98.004 RC13.1 ; DR1.1 75.866,42.004 reg1.3 77.456,40.64 85.598,40.64 86.106,40.132 PC2.1 ; v1(78.232,85.09) 81.869,85.09 REG2.1 ; P4.3 94.107,111.379 84.709,101.981 80.05,101.981 RC13.1 ; 39.52,101.092 40.663,99.949 74.128,99.949 RC13.1
  Bottom Layer w0.5: pad.89 92.71,38.862 98.171,44.323 98.171,111.125 P4.3
  Bottom Layer w1: RC12.1 68.754,98.004 73.747,98.004 ; RC13.1 73.747,98.004 ; v1(78.232,85.09) 70.485,92.837 70.485,94.742 73.747,98.004
pads on no net: GD1.5 GJ2.8 GJ2.9 GJ2.10 GJ2.11 GJ2.C6 SU1.8 SU1.9 SU1.11 SU1.14 U1.3 U1.4 U1.5 U1.6 U1.7 U1.9 U1.10 U1.11 U1.12 U1.14 U1.20 U1.24 U1.25 U1.26 U1.28 U1.29 U1.38 U1.39 U1.40 U1.42 U2.2 U2.3 U2.14 U2.15 U2.26 U2.27 U2.28

## Keep-outs
Keep-Out Layer:
  lines w0.254: 25.146,25.654 98.806,25.654 98.806,117.475 25.654,117.475 25.654,25.781

## Other copper
Top Layer:
  region net GSM_ANT: 30.226,43.942 37.973,44.069 38.227,44.196 38.227,44.45 37.719,44.831 30.226,44.958
  region net GND: 28.067,43.561 28.067,42.418 36.957,42.418 38.1,43.561
  region net GND: 38.227,45.466 38.227,46.609 37.846,46.99 28.067,46.99 28.067,45.339 28.194,45.212 36.703,45.212
  region net GND: 28.067,42.418 28.067,43.053 27.178,43.942 27.178,46.101 28.067,46.99 28.067,43.053 27.178,43.942
Bottom Layer:
  rectangle net GND: 27.559,101.6 46.609,115.189